# EAGLE board ir_sense_panel (EAGLE 7.0.0)
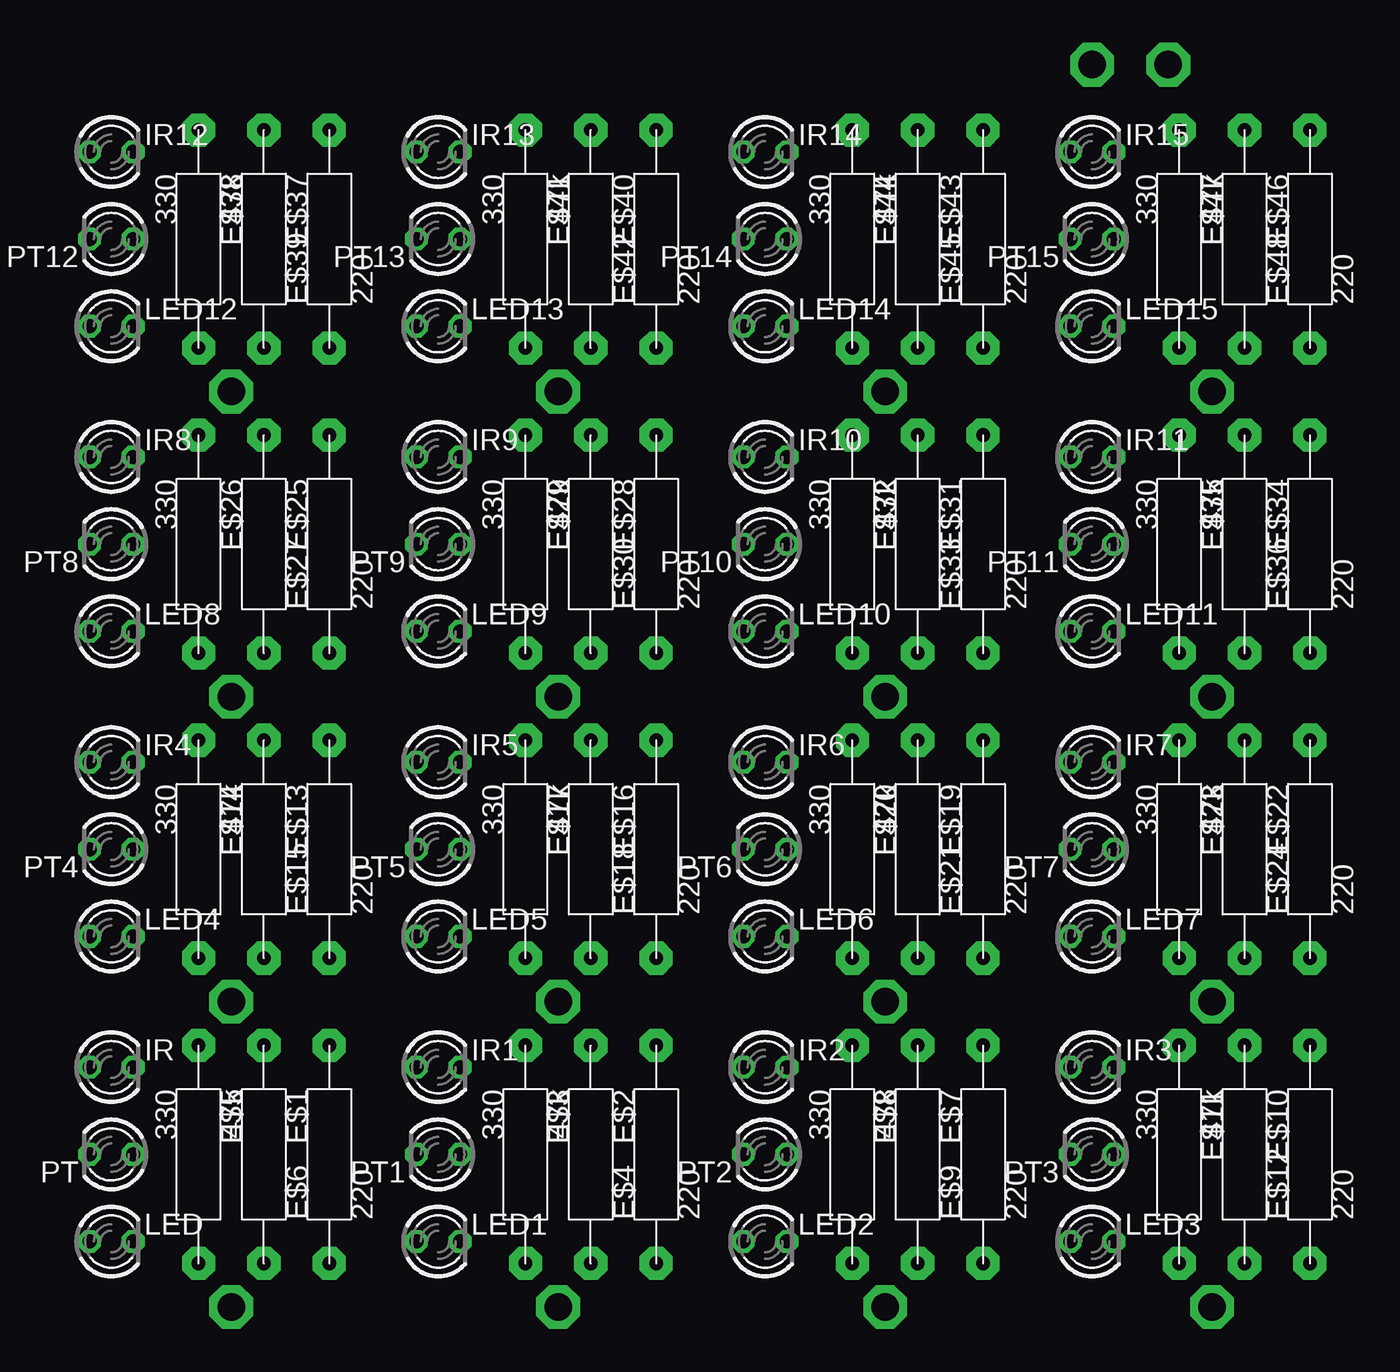
[diagram p0: board, top side]
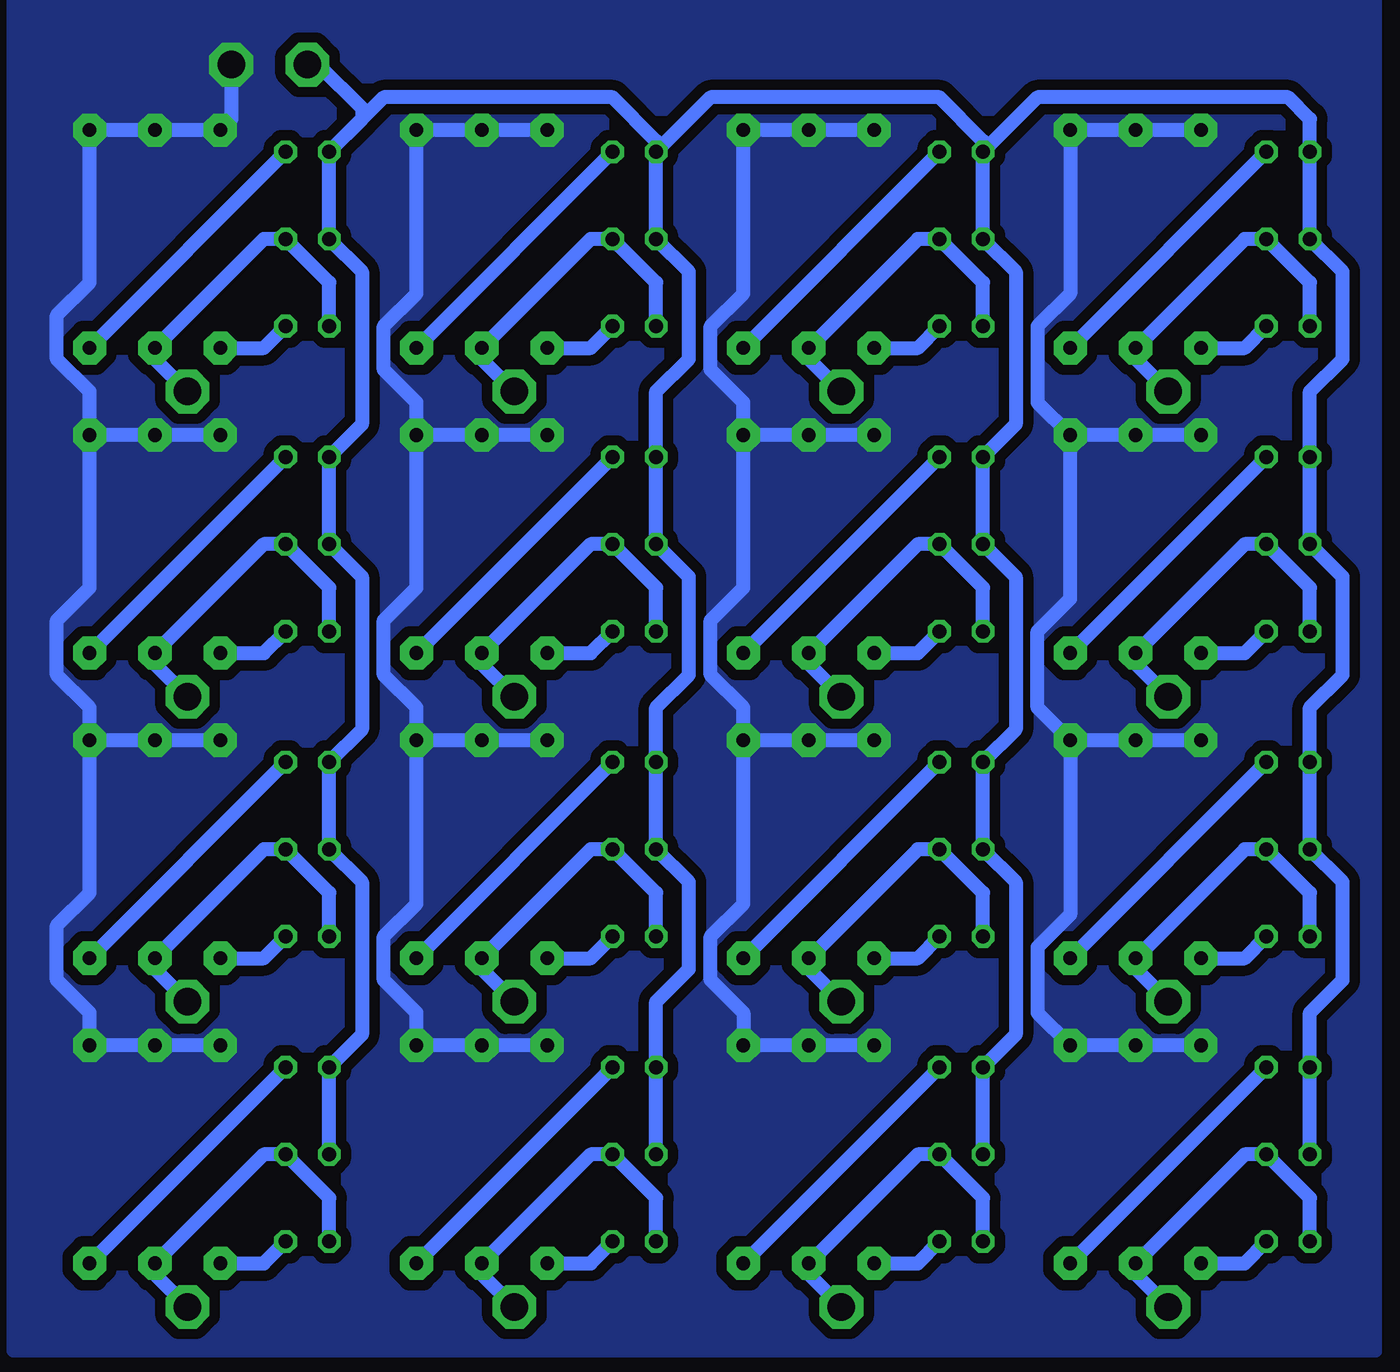
[diagram p1: board, bottom side, seen from below]

No outline drawn. Coordinates in mm, seen from the top.
Copper layers (1*16): Top 0.035mm / dielectric 1.5mm / Bottom 0.035mm
Design rules "default": minimum track width 10mil, minimum drill 24mil, track to track 8mil, track to pad 8mil, pad to pad 8mil, via to via 8mil, smd to smd 8mil, copper to edge 40mil, drill to drill 8mil, minimum pad ring 10mil, minimum via ring 8mil, stop-mask expansion 4mil, vias tented up to drill 0mil, thermal gap 10mil

## Footprints (pad centres in the part's own frame; a part is rotated, then mirrored left to right if it is on the bottom)
RESISTOR_LRG_PAD = drill 0.8 pad 1.93 octagon: P$4 -6.35,0; P$5 6.35,0
V_PAD_MED = drill 1.6 pad 2.54 octagon: P$1 0,0
LED3MM = drill 0.813 octagon: A -1.27,0; K 1.27,0

## Placement (x,y rotation side)
E$1  47k  [RESISTOR_LRG_PAD]  14.61,12.7 270 top
E$2  47k  [RESISTOR_LRG_PAD]  33.66,12.7 270 top
E$3  330  [RESISTOR_LRG_PAD]  29.84,12.7 270 top
E$4  220  [RESISTOR_LRG_PAD]  37.47,12.7 90 top
E$5  330  [RESISTOR_LRG_PAD]  10.79,12.7 270 top
E$6  220  [RESISTOR_LRG_PAD]  18.41,12.7 90 top
E$7  47k  [RESISTOR_LRG_PAD]  52.7,12.7 270 top
E$8  330  [RESISTOR_LRG_PAD]  48.9,12.7 270 top
E$9  220  [RESISTOR_LRG_PAD]  56.52,12.7 90 top
E$10  47k  [RESISTOR_LRG_PAD]  71.75,12.7 270 top
E$11  330  [RESISTOR_LRG_PAD]  67.94,12.7 270 top
E$12  220  [RESISTOR_LRG_PAD]  75.56,12.7 90 top
E$13  47k  [RESISTOR_LRG_PAD]  14.61,30.48 270 top
E$14  330  [RESISTOR_LRG_PAD]  10.79,30.48 270 top
E$15  220  [RESISTOR_LRG_PAD]  18.41,30.48 90 top
E$16  47k  [RESISTOR_LRG_PAD]  33.66,30.48 270 top
E$17  330  [RESISTOR_LRG_PAD]  29.84,30.48 270 top
E$18  220  [RESISTOR_LRG_PAD]  37.47,30.48 90 top
E$19  47k  [RESISTOR_LRG_PAD]  52.7,30.48 270 top
E$20  330  [RESISTOR_LRG_PAD]  48.9,30.48 270 top
E$21  220  [RESISTOR_LRG_PAD]  56.52,30.48 90 top
E$22  47k  [RESISTOR_LRG_PAD]  71.75,30.48 270 top
E$23  330  [RESISTOR_LRG_PAD]  67.94,30.48 270 top
E$24  220  [RESISTOR_LRG_PAD]  75.56,30.48 90 top
E$25  [RESISTOR_LRG_PAD]  14.61,48.26 270 top
E$26  330  [RESISTOR_LRG_PAD]  10.79,48.26 270 top
E$27  220  [RESISTOR_LRG_PAD]  18.41,48.26 90 top
E$28  47k  [RESISTOR_LRG_PAD]  33.66,48.26 270 top
E$29  330  [RESISTOR_LRG_PAD]  29.84,48.26 270 top
E$30  220  [RESISTOR_LRG_PAD]  37.47,48.26 90 top
E$31  47k  [RESISTOR_LRG_PAD]  52.7,48.26 270 top
E$32  330  [RESISTOR_LRG_PAD]  48.9,48.26 270 top
E$33  220  [RESISTOR_LRG_PAD]  56.52,48.26 90 top
E$34  47k  [RESISTOR_LRG_PAD]  71.75,48.26 270 top
E$35  330  [RESISTOR_LRG_PAD]  67.94,48.26 270 top
E$36  220  [RESISTOR_LRG_PAD]  75.56,48.26 90 top
E$37  47k  [RESISTOR_LRG_PAD]  14.61,66.04 270 top
E$38  330  [RESISTOR_LRG_PAD]  10.79,66.04 270 top
E$39  220  [RESISTOR_LRG_PAD]  18.41,66.04 90 top
E$40  47k  [RESISTOR_LRG_PAD]  33.66,66.04 270 top
E$41  330  [RESISTOR_LRG_PAD]  29.84,66.04 270 top
E$42  220  [RESISTOR_LRG_PAD]  37.47,66.04 90 top
E$43  47k  [RESISTOR_LRG_PAD]  52.7,66.04 270 top
E$44  330  [RESISTOR_LRG_PAD]  48.9,66.04 270 top
E$45  220  [RESISTOR_LRG_PAD]  56.52,66.04 90 top
E$46  47k  [RESISTOR_LRG_PAD]  71.75,66.04 270 top
E$47  330  [RESISTOR_LRG_PAD]  67.94,66.04 270 top
E$48  220  [RESISTOR_LRG_PAD]  75.56,66.04 90 top
E$49  [V_PAD_MED]  12.7,21.59 0 top
E$50  [V_PAD_MED]  12.7,39.37 0 top
E$51  [V_PAD_MED]  12.7,57.15 0 top
E$52  [V_PAD_MED]  31.75,57.15 0 top
E$53  [V_PAD_MED]  50.8,57.15 0 top
E$54  [V_PAD_MED]  69.85,57.15 0 top
E$55  [V_PAD_MED]  69.85,39.37 0 top
E$56  [V_PAD_MED]  50.8,39.37 0 top
E$57  [V_PAD_MED]  31.75,39.37 0 top
E$58  [V_PAD_MED]  31.75,21.59 0 top
E$59  [V_PAD_MED]  50.8,21.59 0 top
E$60  [V_PAD_MED]  69.85,21.59 0 top
E$61  [V_PAD_MED]  12.7,3.81 0 top
E$62  [V_PAD_MED]  31.75,3.81 0 top
E$63  [V_PAD_MED]  50.8,3.81 0 top
E$64  [V_PAD_MED]  69.85,3.81 0 top
GND  [V_PAD_MED]  67.31,76.2 0 top
IR  [LED3MM]  5.71,17.78 0 top
IR1  [LED3MM]  24.77,17.78 0 top
IR2  [LED3MM]  43.81,17.78 0 top
IR3  [LED3MM]  62.87,17.78 0 top
IR4  [LED3MM]  5.71,35.56 0 top
IR5  [LED3MM]  24.77,35.56 0 top
IR6  [LED3MM]  43.81,35.56 0 top
IR7  [LED3MM]  62.87,35.56 0 top
IR8  [LED3MM]  5.71,53.34 0 top
IR9  [LED3MM]  24.77,53.34 0 top
IR10  [LED3MM]  43.81,53.34 0 top
IR11  [LED3MM]  62.87,53.34 0 top
IR12  [LED3MM]  5.71,71.12 0 top
IR13  [LED3MM]  24.77,71.12 0 top
IR14  [LED3MM]  43.81,71.12 0 top
IR15  [LED3MM]  62.87,71.12 0 top
LED  [LED3MM]  5.71,7.62 0 top
LED1  [LED3MM]  24.77,7.62 0 top
LED2  [LED3MM]  43.81,7.62 0 top
LED3  [LED3MM]  62.87,7.62 0 top
LED4  [LED3MM]  5.71,25.4 0 top
LED5  [LED3MM]  24.77,25.4 0 top
LED6  [LED3MM]  43.81,25.4 0 top
LED7  [LED3MM]  62.87,25.4 0 top
LED8  [LED3MM]  5.71,43.18 0 top
LED9  [LED3MM]  24.77,43.18 0 top
LED10  [LED3MM]  43.81,43.18 0 top
LED11  [LED3MM]  62.87,43.18 0 top
LED12  [LED3MM]  5.71,60.96 0 top
LED13  [LED3MM]  24.77,60.96 0 top
LED14  [LED3MM]  43.81,60.96 0 top
LED15  [LED3MM]  62.87,60.96 0 top
PT  [LED3MM]  5.71,12.7 180 top
PT1  [LED3MM]  24.77,12.7 180 top
PT2  [LED3MM]  43.81,12.7 180 top
PT3  [LED3MM]  62.87,12.7 180 top
PT4  [LED3MM]  5.71,30.48 180 top
PT5  [LED3MM]  24.77,30.48 180 top
PT6  [LED3MM]  43.81,30.48 180 top
PT7  [LED3MM]  62.87,30.48 180 top
PT8  [LED3MM]  5.71,48.26 180 top
PT9  [LED3MM]  24.77,48.26 180 top
PT10  [LED3MM]  43.81,48.26 180 top
PT11  [LED3MM]  62.87,48.26 180 top
PT12  [LED3MM]  5.71,66.04 180 top
PT13  [LED3MM]  24.77,66.04 180 top
PT14  [LED3MM]  43.81,66.04 180 top
PT15  [LED3MM]  62.87,66.04 180 top
VCC  [V_PAD_MED]  62.87,76.2 0 top

## Library data of the parts
E$1-E$64 GND VCC = custom
IR IR1-IR15 LED LED1-LED15 PT PT1-PT15 = led

## Nets
GND: E$1.P$4 E$2.P$4 E$3.P$4 E$4.P$5 E$5.P$4 E$6.P$5 E$7.P$4 E$8.P$4 E$9.P$5 E$10.P$4 E$11.P$4 E$12.P$5 E$13.P$4 E$14.P$4 E$15.P$5 E$16.P$4 E$17.P$4 E$18.P$5 E$19.P$4 E$20.P$4 E$21.P$5 E$22.P$4 E$23.P$4 E$24.P$5 E$25.P$4 E$26.P$4 E$27.P$5 E$28.P$4 E$29.P$4 E$30.P$5 E$31.P$4 E$32.P$4 E$33.P$5 E$34.P$4 E$35.P$4 E$36.P$5 E$37.P$4 E$38.P$4 E$39.P$5 E$40.P$4 E$41.P$4 E$42.P$5 E$43.P$4 E$44.P$4 E$45.P$5 E$46.P$4 E$47.P$4 E$48.P$5 GND.P$1
S$1: E$1.P$5 E$61.P$1 LED.A PT.A
S$2: E$6.P$4 IR.K
S$3: E$5.P$5 LED.K
S$4: E$2.P$5 E$62.P$1 LED1.A PT1.A
S$5: E$4.P$4 IR1.K
S$6: E$3.P$5 LED1.K
S$7: E$7.P$5 E$63.P$1 LED2.A PT2.A
S$8: E$9.P$4 IR2.K
S$9: E$8.P$5 LED2.K
S$10: E$10.P$5 E$64.P$1 LED3.A PT3.A
S$11: E$12.P$4 IR3.K
S$12: E$11.P$5 LED3.K
S$13: E$13.P$5 E$49.P$1 LED4.A PT4.A
S$14: E$15.P$4 IR4.K
S$15: E$14.P$5 LED4.K
S$16: E$16.P$5 E$58.P$1 LED5.A PT5.A
S$17: E$18.P$4 IR5.K
S$18: E$17.P$5 LED5.K
S$19: E$19.P$5 E$59.P$1 LED6.A PT6.A
S$20: E$21.P$4 IR6.K
S$21: E$20.P$5 LED6.K
S$22: E$22.P$5 E$60.P$1 LED7.A PT7.A
S$23: E$24.P$4 IR7.K
S$24: E$23.P$5 LED7.K
S$25: E$25.P$5 E$50.P$1 LED8.A PT8.A
S$26: E$27.P$4 IR8.K
S$27: E$26.P$5 LED8.K
S$28: E$28.P$5 E$57.P$1 LED9.A PT9.A
S$29: E$30.P$4 IR9.K
S$30: E$29.P$5 LED9.K
S$31: E$31.P$5 E$56.P$1 LED10.A PT10.A
S$32: E$33.P$4 IR10.K
S$33: E$32.P$5 LED10.K
S$34: E$34.P$5 E$55.P$1 LED11.A PT11.A
S$35: E$36.P$4 IR11.K
S$36: E$35.P$5 LED11.K
S$37: E$37.P$5 E$51.P$1 LED12.A PT12.A
S$38: E$39.P$4 IR12.K
S$39: E$38.P$5 LED12.K
S$40: E$40.P$5 E$52.P$1 LED13.A PT13.A
S$41: E$42.P$4 IR13.K
S$42: E$41.P$5 LED13.K
S$43: E$43.P$5 E$53.P$1 LED14.A PT14.A
S$44: E$45.P$4 IR14.K
S$45: E$44.P$5 LED14.K
S$46: E$46.P$5 E$54.P$1 LED15.A PT15.A
S$47: E$48.P$4 IR15.K
S$48: E$47.P$5 LED15.K
VCC: IR1.A IR2.A IR3.A IR4.A IR5.A IR6.A IR7.A IR8.A IR9.A IR10.A IR11.A IR12.A IR13.A IR14.A IR15.A IR.A PT1.K PT2.K PT3.K PT4.K PT5.K PT6.K PT7.K PT8.K PT9.K PT10.K PT11.K PT12.K PT13.K PT14.K PT15.K PT.K VCC.P$1

## Tracks (layer width: path | path; a pad name or v marks a point on that pad's centre or on a via)
GND
  Bottom 0.813: E$5.P$4 E$1.P$4 E$6.P$5 20.32,20.95 20.32,24.77 18.41,26.67 E$15.P$5 | E$3.P$4 E$2.P$4 E$4.P$5 37.47,20.95 39.37,22.86 39.37,25.4 37.47,27.3 E$18.P$5 | E$8.P$4 E$7.P$4 E$9.P$5 56.52,20.95 58.42,22.86 58.42,25.4 56.52,27.3 E$21.P$5 | E$11.P$4 E$10.P$4 E$12.P$5 75.56,20.95 77.47,22.86 77.47,26.04 75.56,27.94 E$24.P$5 | E$24.P$5 E$22.P$4 E$23.P$4 E$24.P$5 | E$20.P$4 E$19.P$4 E$21.P$5 | E$17.P$4 E$16.P$4 E$18.P$5 | E$14.P$4 E$13.P$4 E$15.P$5 | E$26.P$4 E$25.P$4 E$27.P$5 | E$29.P$4 E$28.P$4 E$30.P$5 | E$32.P$4 E$31.P$4 E$33.P$5 | E$35.P$4 E$34.P$4 E$36.P$5 | E$44.P$4 E$43.P$4 E$45.P$5 56.52,62.87 58.42,60.96 58.42,58.42 56.52,56.52 E$33.P$5 | E$41.P$4 E$40.P$4 E$42.P$5 37.47,62.87 39.37,60.96 39.37,58.42 37.47,56.52 E$30.P$5 | E$38.P$4 E$37.P$4 E$39.P$5 18.41,62.87 20.32,60.96 20.32,56.52 E$27.P$5 | E$27.P$5 18.41,45.09 20.32,43.18 20.32,38.73 E$15.P$5 | E$18.P$5 37.47,38.73 39.37,40.64 39.37,43.81 37.47,45.72 E$30.P$5 | E$21.P$5 56.52,38.73 58.42,40.64 58.42,43.81 56.52,45.72 E$33.P$5 | E$24.P$5 75.56,38.73 77.47,40.64 77.47,43.81 75.56,45.72 E$36.P$5 | E$36.P$5 75.56,57.15 77.47,59.05 77.47,61.59 75.56,63.5 E$48.P$5 E$46.P$4 E$47.P$4 67.31,73.03 GND.P$1
  pour Bottom (isolate 0.61, no thermals): 0.64,1.27 0.64,80.01 80.01,80.01 80.01,1.27
S$1
  Bottom 0.813: LED.A 4.45,10.16 PT.A 8.26,12.7 E$1.P$5 14.61,5.71 E$61.P$1
S$2
  Bottom 0.813: IR.K E$6.P$4
S$3
  Bottom 0.813: E$5.P$5 8.26,6.35 LED.K
S$4
  Bottom 0.813: LED1.A 23.5,10.16 PT1.A 27.3,12.7 E$2.P$5 33.66,5.71 E$62.P$1
S$5
  Bottom 0.813: IR1.K E$4.P$4
S$6
  Bottom 0.813: E$3.P$5 27.3,6.35 LED1.K
S$7
  Bottom 0.813: LED2.A 42.55,10.16 PT2.A 46.35,12.7 E$7.P$5 52.7,5.71 E$63.P$1
S$8
  Bottom 0.813: IR2.K E$9.P$4
S$9
  Bottom 0.813: E$8.P$5 46.35,6.35 LED2.K
S$10
  Bottom 0.813: LED3.A 61.59,10.16 PT3.A 65.41,12.7 E$10.P$5 71.75,5.71 E$64.P$1
S$11
  Bottom 0.813: IR3.K E$12.P$4
S$12
  Bottom 0.813: E$11.P$5 65.41,6.35 LED3.K
S$13
  Bottom 0.813: LED4.A 4.45,27.94 PT4.A 8.26,30.48 E$13.P$5 14.61,23.5 E$49.P$1
S$14
  Bottom 0.813: IR4.K E$15.P$4
S$15
  Bottom 0.813: E$14.P$5 8.26,24.13 LED4.K
S$16
  Bottom 0.813: LED5.A 23.5,27.94 PT5.A 27.3,30.48 E$16.P$5 33.66,23.5 E$58.P$1
S$17
  Bottom 0.813: IR5.K E$18.P$4
S$18
  Bottom 0.813: E$17.P$5 27.3,24.13 LED5.K
S$19
  Bottom 0.813: LED6.A 42.55,27.94 PT6.A 46.35,30.48 E$19.P$5 52.7,23.5 E$59.P$1
S$20
  Bottom 0.813: IR6.K E$21.P$4
S$21
  Bottom 0.813: E$20.P$5 46.35,24.13 LED6.K
S$22
  Bottom 0.813: LED7.A 61.59,27.94 PT7.A 65.41,30.48 E$22.P$5 71.75,23.5 E$60.P$1
S$23
  Bottom 0.813: IR7.K E$24.P$4
S$24
  Bottom 0.813: E$23.P$5 65.41,24.13 LED7.K
S$25
  Bottom 0.813: LED8.A 4.45,45.72 PT8.A 8.26,48.26 E$25.P$5 14.61,41.27 E$50.P$1
S$26
  Bottom 0.813: IR8.K E$27.P$4
S$27
  Bottom 0.813: E$26.P$5 8.26,41.91 LED8.K
S$28
  Bottom 0.813: LED9.A 23.5,45.72 PT9.A 27.3,48.26 E$28.P$5 33.66,41.27 E$57.P$1
S$29
  Bottom 0.813: IR9.K E$30.P$4
S$30
  Bottom 0.813: E$29.P$5 27.3,41.91 LED9.K
S$31
  Bottom 0.813: LED10.A 42.55,45.72 PT10.A 46.35,48.26 E$31.P$5 52.7,41.27 E$56.P$1
S$32
  Bottom 0.813: IR10.K E$33.P$4
S$33
  Bottom 0.813: E$32.P$5 46.35,41.91 LED10.K
S$34
  Bottom 0.813: LED11.A 61.59,45.72 PT11.A 65.41,48.26 E$34.P$5 71.75,41.27 E$55.P$1
S$35
  Bottom 0.813: IR11.K E$36.P$4
S$36
  Bottom 0.813: E$35.P$5 65.41,41.91 LED11.K
S$37
  Bottom 0.813: LED12.A 4.45,63.5 PT12.A 8.26,66.04 E$37.P$5 14.61,59.05 E$51.P$1
S$38
  Bottom 0.813: IR12.K E$39.P$4
S$39
  Bottom 0.813: E$38.P$5 8.26,59.69 LED12.K
S$40
  Bottom 0.813: LED13.A 23.5,63.5 PT13.A 27.3,66.04 E$40.P$5 33.66,59.05 E$52.P$1
S$41
  Bottom 0.813: IR13.K E$42.P$4
S$42
  Bottom 0.813: E$41.P$5 27.3,59.69 LED13.K
S$43
  Bottom 0.813: LED14.A 42.55,63.5 PT14.A 46.35,66.04 E$43.P$5 52.7,59.05 E$53.P$1
S$44
  Bottom 0.813: IR14.K E$45.P$4
S$45
  Bottom 0.813: E$44.P$5 46.35,59.69 LED14.K
S$46
  Bottom 0.813: LED15.A 61.59,63.5 PT15.A 65.41,66.04 E$46.P$5 71.75,59.05 E$54.P$1
S$47
  Bottom 0.813: IR15.K E$48.P$4
S$48
  Bottom 0.813: E$47.P$5 65.41,59.69 LED15.K
VCC
  Bottom 0.813: PT.K IR.A 4.45,20.95 2.54,22.86 2.54,28.57 PT4.K IR4.A 4.45,38.73 2.54,40.64 2.54,46.35 PT8.K IR8.A 4.45,57.15 2.54,59.05 2.54,64.14 PT12.K IR12.A 4.45,73.03 5.71,74.3 20.32,74.3 IR13.A | PT1.K IR1.A 21.59,19.68 21.59,28.57 PT5.K IR5.A 21.59,37.47 21.59,46.35 PT9.K IR9.A 21.59,55.24 21.59,64.14 PT13.K IR13.A | PT2.K IR2.A 42.55,21.59 40.64,23.5 40.64,28.57 PT6.K IR6.A 42.55,38.73 40.64,40.64 40.64,46.35 PT10.K IR10.A 42.55,57.15 40.64,59.05 40.64,64.14 PT14.K IR14.A | PT3.K IR3.A 59.69,19.68 59.69,28.57 PT7.K IR7.A 59.69,37.47 59.69,46.35 PT11.K IR11.A 59.69,55.24 59.69,64.14 PT15.K IR15.A | IR13.A 23.5,71.75 26.04,74.3 39.37,74.3 IR14.A | IR14.A 42.55,71.75 45.09,74.3 58.42,74.3 IR15.A | VCC.P$1 62.23,76.2 59.69,73.66 59.69,73.03 IR15.A